# Altium PCB captivate_iso.PcbDoc
Units mil, origin at the board's own origin, x right, y up, seen from the top; angles counter-clockwise.
Board outline 1500 x 1200 mil, 2 copper layers (Top Layer, Bottom Layer), stack 62 mil thick; 20 components, 18 nets, 92 pads, 14 vias.
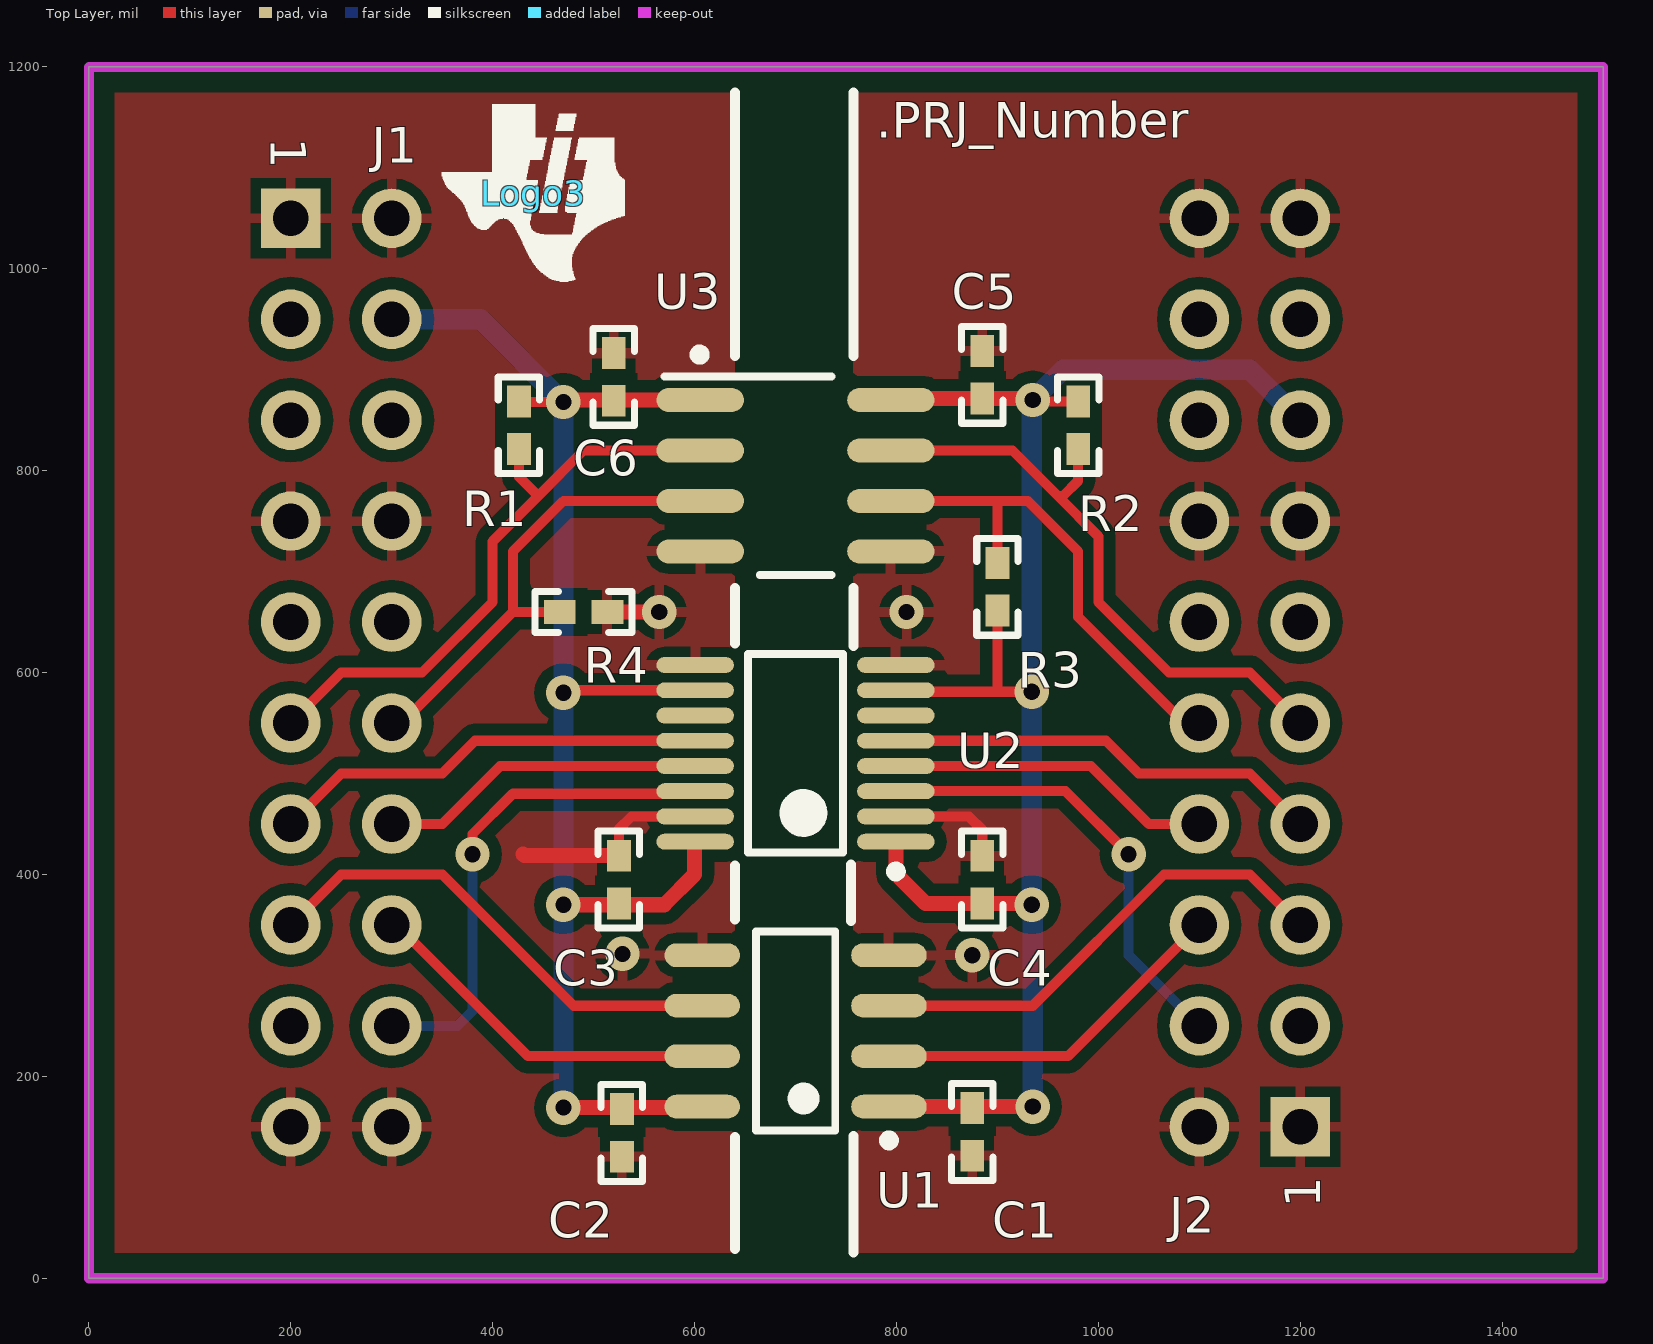
[diagram p0: Top Layer view]
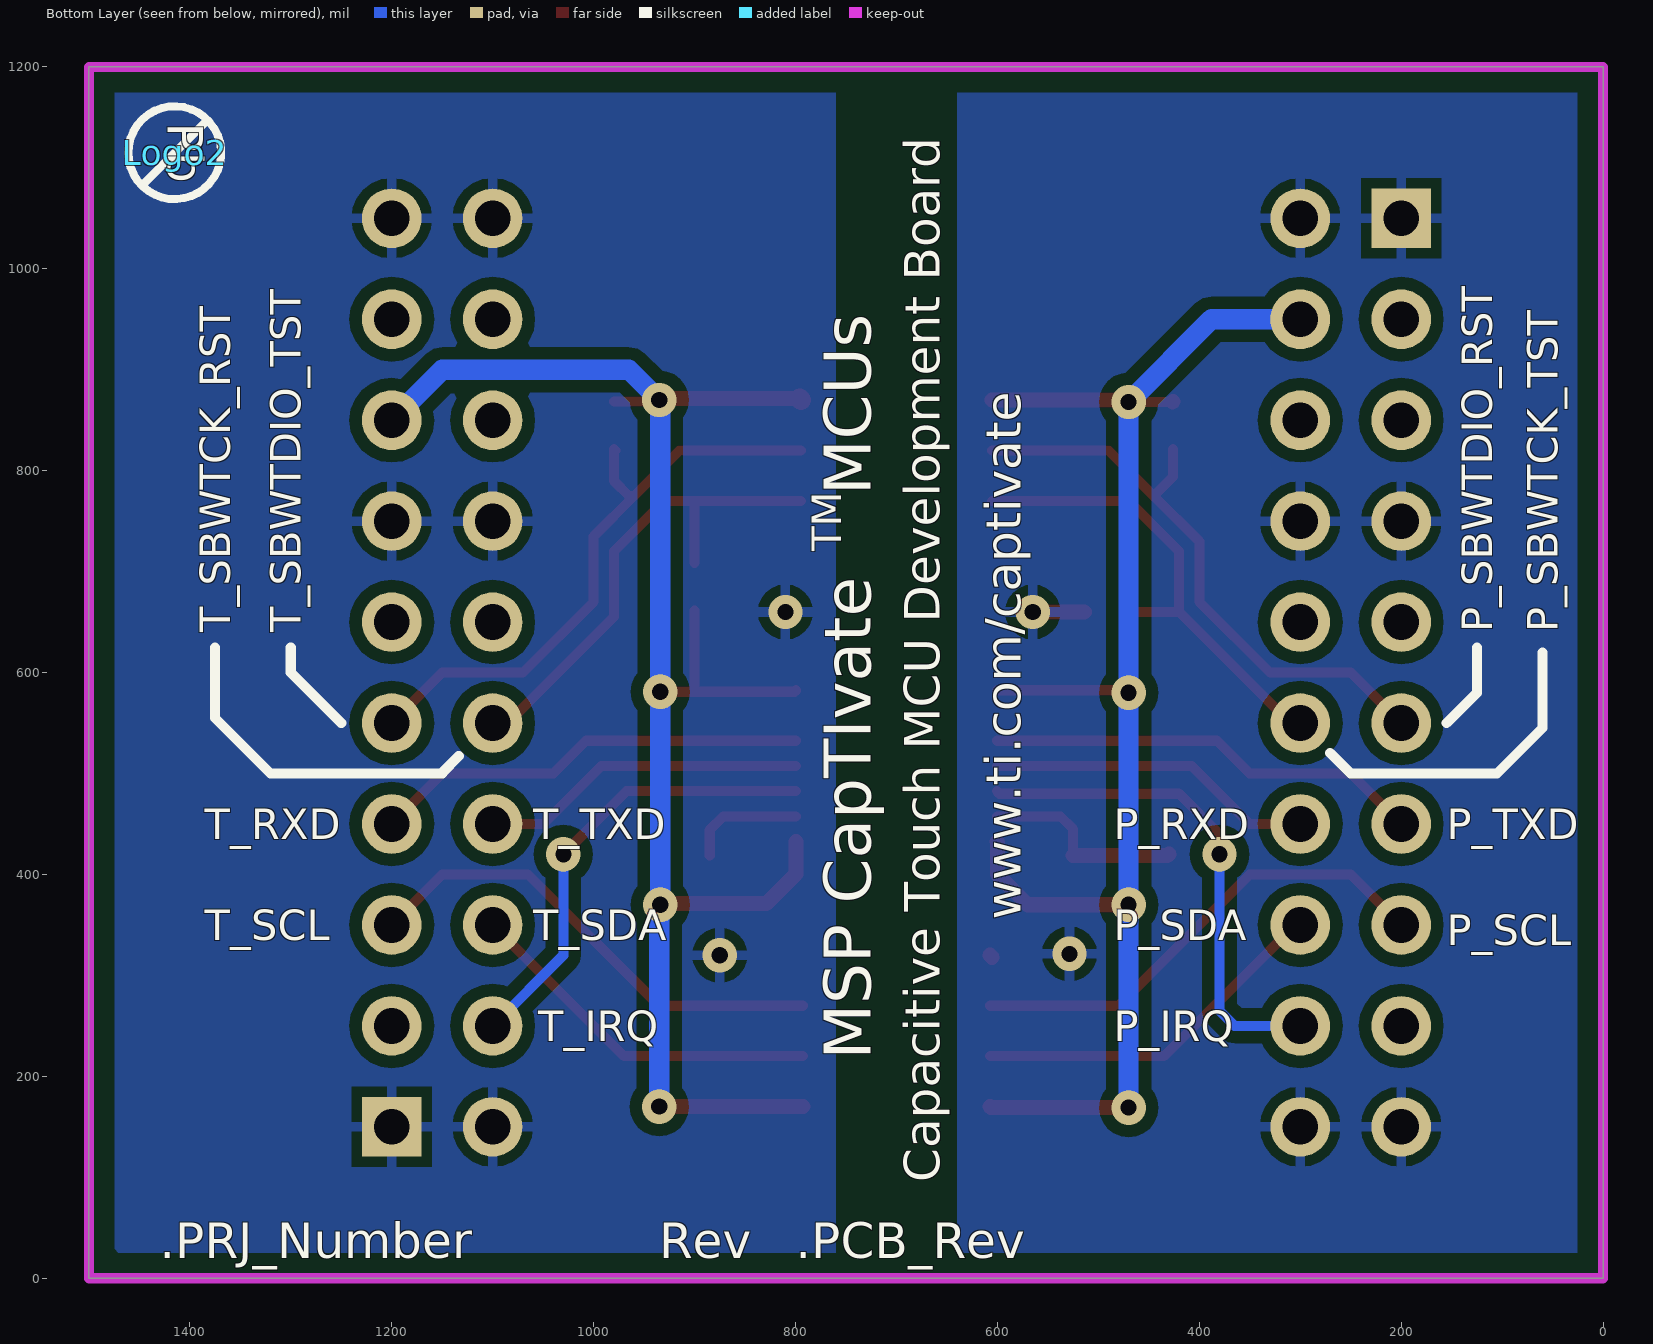
[diagram p1: Bottom Layer view, seen from below]

## Layer stack, top to bottom
Top Solder: solder mask 0.4, Solder Resist, Dk 3.5
Top Layer: signal copper 1.4
Dielectric1: core 59.2, FR-4, Dk 4.8
Bottom Layer: signal copper 1.4
Bottom Solder: solder mask 0.4, Solder Resist, Dk 3.5

## Board outline
0,0 1500,0 1500,1200 0,1200

## Design rules (kind name [scope] priority, off if disabled: settings)
AcuteAngle [All] p1: minimum=4.50000000000000E+0001 checktracksonly=FALSE
AssemblyTestPointUsage [All] p1: valid=2
Clearance Clearance_Keepouts [((IsTrack Or IsArc) And Not InPoly) And IsFree and IsKeepOut vs ((IsTrack Or IsArc) And Not InPoly) And IsFree and IsKeepOut] p1: gap=0
Clearance Clearance_BoardEdge_MountingHoles [OnCopper and InComponentClass('Mounting Holes') vs IsKeepOut] p2: gap=40
Clearance Clearance_BoardEdge_Poly [OnCopper and InPoly vs IsKeepOut] p3: gap=20
Clearance Clearance_BoardEdge [OnCopper and Not InComponentClass('Logo') and not InComponentClass('FiducialMark') and not InRegion(1000,500,4000,800) and Not IsKeepout vs IsKeepOut] p4: gap=75
Clearance Clearance_Poly [InPolygon] p5: gap=12
Clearance [All] p6: gap=7.87
ComponentClearance ComponentClearance_MountingHoles_FiducialMarks [InComponentClass('Mounting Holes') vs InComponentClass('FiducialMark')] p1: gap=50 collisioncheckmode=3 verticalgap=10 showdistances=FALSE
ComponentClearance ComponentClearance_Shunt [InComponentClass('Header') vs InComponentClass('Shunt')] p2: gap=0 collisioncheckmode=3 verticalgap=0 showdistances=FALSE
ComponentClearance ComponentClearance_Logo [InComponentClass('Logo')] p3: gap=50 collisioncheckmode=3 verticalgap=10 showdistances=FALSE
ComponentClearance ComponentClearance_ScrewToNut [(HasFootprint('NY PMS 440 0025 PH')) vs (HasFootprint('Keystone_1902C'))] p4: gap=5 collisioncheckmode=3 verticalgap=10 showdistances=FALSE
ComponentClearance ComponentClearance_MountingHoles [InComponentClass('Mounting Holes')] p5: gap=250 collisioncheckmode=3 verticalgap=100000 showdistances=FALSE
ComponentClearance ComponentClearance_SmallPassives [HasFootprint('0201*') or HasFootprint('0402*') or HasFootprint('0508') or HasFootprint('0603*') or HasFootprint('0612') or HasFootprint('0805*') or HasFootprint('0815*') or HasFootprint('0830*') or HasFootprint('1206*') or HasFootprint('1210*') or HasFootprint('1808*') or HasFootprint('1812*') or HasFootprint('1825*') or HasFootprint('2010*') or HasFootprint('2220*') or HasFootprint('2225*') or HasFootprint('2512*') or HasFootprint('2728*') or HasFootprint('3518*') vs HasFootprint('0201*') or HasFootprint('0402*') or HasFootprint('0508') or HasFootprint('0603*') or HasFootprint('0612') or HasFootprint('0805*') or HasFootprint('0815*') or HasFootprint('0830*') or HasFootprint('1206*') or HasFootprint('1210*') or HasFootprint('1808*') or HasFootprint('1812*') or HasFootprint('1825*') or HasFootprint('2010*') or HasFootprint('2220*') or HasFootprint('2225*') or HasFootprint('2512*') or HasFootprint('2728*') or HasFootprint('3518*')] p6: gap=20 collisioncheckmode=3 verticalgap=10 showdistances=FALSE
ComponentClearance ComponentClearance_THtoSMT [IsThruComponent vs IsSMTComponent] p7: gap=100 collisioncheckmode=3 verticalgap=30 showdistances=FALSE
ComponentClearance ComponentClearance_THtoTH [IsThruComponent vs IsThruComponent] p8: gap=118.11 collisioncheckmode=3 verticalgap=30 showdistances=FALSE
ComponentClearance [All] p9: gap=40 collisioncheckmode=3 verticalgap=10 showdistances=FALSE
DiffPairsRouting [All] p1: maxlimit=100 minlimit=10 mostfreqgap=10 toplayer_minwidth=15 toplayer_maxwidth=15 toplayer_prefwidth=15 bottomlayer_minwidth=15 bottomlayer_maxwidth=15 bottomlayer_prefwidth=15 maxuncoupledlength=1000
FabricationTestPointUsage TestPointUsage [All] p1: valid=2 allowmultiple=FALSE
FabricationTestpoint Testpoint [All] p1: side=3 testpointundercomponent=TRUE minsize=40 maxsize=100 preferedsize=60 minholesize=0 maxholesize=40 preferedholesize=32 testpointgrid=1 allowsidetop=TRUE allowsidebottom=TRUE usegrid=TRUE gridtolerance=0.01
FanoutControl Fanout_LCC [IsLCC] p1: bgadir=Out bgaviamode=Centered fanoutstyle=Auto fanoutdirection=Alternating viagrid=1 // Fanout_LCC (Default Rule)
FanoutControl Fanout_BGA [IsBGA] p2: bgadir=Out bgaviamode=Centered fanoutstyle=Auto fanoutdirection=Alternating viagrid=1 // Fanout_BGA (Default Rule)
FanoutControl Fanout_Default [All] p4: bgadir=Out bgaviamode=Centered fanoutstyle=Auto fanoutdirection=Alternating viagrid=1 // Fanout_Default (Default Rule)
FanoutControl Fanout_Small [(CompPinCount < 5)] p5: bgadir=Out bgaviamode=Centered fanoutstyle=Auto fanoutdirection=OutThenIn viagrid=1 // Fanout_Small (Default Rule)
HoleSize [All] p1: absolutevalues=TRUE maxlimit=251 minlimit=8 maxpercent=80.000 minpercent=20.000
MinimumAnnularRing MinimumAnnularRing_ThermalPadVias [IsVia and InAnyComponent] p1: minimumring=5.91
MinimumAnnularRing [All] p2: minimumring=9
MinimumSolderMaskSliver MinimumSolderMaskSliver_Logo [InComponentClass('Logo') vs InComponentClass('Logo')] p1: minsoldermaskwidth=0.7
MinimumSolderMaskSliver [All] p2: minsoldermaskwidth=3.94
PlaneConnect [All] p1: planeconnectstyle=Relief reliefexpansion=10 reliefentries=4 reliefconductorwidth=10 reliefairgap=10
PolygonConnect [All] p1: connectstyle=Relief reliefconductorwidth=10 reliefentries=4 polygonreliefangle="90 Angle" airgapwidth=10
RoutingVias ThermalPadVias [IsVia and InAnyComponent] p1: holewidth=7.87 width=19.68 viastyle="Through Hole" minholewidth=7.87 minwidth=19.68 maxholewidth=12.99 maxwidth=23.62
RoutingVias [All] p2: holewidth=16 width=34 viastyle="Through Hole" minholewidth=7.87 minwidth=26 maxholewidth=40 maxwidth=65
SilkToBoardRegionClearance [Not ((IsComment or IsDesignator) And (Hide <> 'False')) and not InRegion(1000,500,4000,800)] p1:
SilkToSilkClearance SilkToSilkClearance_Pb-FreeLogo [(HasFootprint('Pb-Free_Overlay_Medium') OR HasFootprint('Pb-Free_Overlay_Small')) vs (HasFootprint('Pb-Free_Overlay_Medium') OR HasFootprint('Pb-Free_Overlay_Small'))] p1: silktosilkclearance=0
SilkToSilkClearance [All] p2: silktosilkclearance=5
SilkToSolderMaskClearance "Silk to Solder Mask Opening" [All] p1: minsilkscreentomaskgap=1 clearancetoexposedcopper=FALSE
SolderMaskExpansion [All] p1: expansion=1.97
UnpouredPolygon [All] p1: allowunpoured=FALSE
Width [All] p1: maxlimit=100 minlimit=6 preferedwidth=10 checkconnectedcopper=TRUE
14 further rules are at their usual default settings.

## Classes and differential pairs
component class hardware: !PCB Logo2 Logo3 ZZ1 ZZ2 ZZ3
component class Logo: Logo3
component class captivate_iso: C1 C2 C3 C4 C5 C6 J1 J2 R1 R2 R3 R4 U1 U2 U3
component class AssemblyNote: ZZ1 ZZ2 ZZ3

## Components (designator, comment, footprint, x,y, rotation, side; value= is the part's Value field where it differs from the comment)
C1 "C1005X5R1A104K" 0402 875,145 r270 top
C2 "C1005X5R1A104K" 0402 528,144 r90 top
C3 "C1005X5R1A104K" 0402 525,395 r270 top
C4 "C1005X5R1A104K" 0402 885,395 r270 top
C5 "C1005X5R1A104K" 0402 885,895 r90 top
C6 "C1005X5R1A104K" 0402 520,893 r270 top
J1 "Connector 10X2RA" CONN2X10RA 200,1050 r270 top locked
J2 "Header 10X2RA" HDR2X10RA 1200,150 r90 top locked
Logo2 "Pb-Free Symbol" Pb-Free_Overlay_Small 1415,1115 r270 bottom
Logo3 "Texas Instruments" TI_Symbol_Overlay_Small 440,1075 r0 top
R1 "CRCW04021K50JNED" 0402 426,845 r90 top
R2 "CRCW0402270RJNED" 0402 980,845 r90 top
R3 "CRCW04021K50JNED" 0402 900,685 r270 top
R4 "CRCW040230K0JNED" 0402 490,660 r180 top
U1 "ISO1540" D0008A_L 700,245 r180 top
U2 "ISO7131CCDBQ" DBQ0016A_N 700,520 r180 top
U3 "ISO1541D" D0008A_N 700,795 r0 top
ZZ1 "These assemblies are ESD sensitive, ESD precautions shall be observed." AssemblyNote -30,2060 r0 top
ZZ2 "These assemblies must be clean and free from flux and all contaminants. Use of no clean flux is not acceptable." AssemblyNote -30,2260 r0 top
ZZ3 "These assemblies must comply with workmanship standards IPC-A-610 Class 2, unless otherwise specified." AssemblyNote -30,2460 r0 top

## Footprints (in the part's own frame and the unit in brackets; to place one, negate y for a bottom-side part, rotate by r counter-clockwise, add the part's x,y. Pads: shape width x height; smd on the part's side, far side on the other; paste and mask are expansions set on the pad)
0402 [mm] "0402 from SM-752 data"
  rect 0.8x0.6 smd: 1(-0.6,0) 2(0.6,0)
  silkscreen extent -1.22,-0.52 1.22,0.52, body extent -0.55,-0.3 0.55,0.3, height 0.6
AssemblyNote [mil] "Assembly Note"
CONN2X10RA [mm] "Connector;F-Receptacle; 10x2 Position; Right Angle"
  rect 1.5x1.5 hole 0.9: 1(0,0)
  round 1.5 hole 0.9: 2(0,2.54) 3(2.54,0) 4(2.54,2.54) 5(5.08,0) 6(5.08,2.54) 7(7.62,0) 8(7.62,2.54) 9(10.16,0) 10(10.16,2.54) 11(12.7,0) 12(12.7,2.54) 13(15.24,0) 14(15.24,2.54) 15(17.78,0) 16(17.78,2.54) 17(20.32,0) 18(20.32,2.54) 19(22.86,0) 20(22.86,2.54)
  body extent -1.52,-10.03 24.38,-1.52, height 4.95
D0008A_L [mm] "SOIC, 8-Leads, Body 4.9x3.9mm, Pitch 1.27mm, IPC High Density"
  oval 1.9x0.6 smd: 1(-2.35,1.905) 2(-2.35,0.635) 3(-2.35,-0.635) 4(-2.35,-1.905) 5(2.35,-1.905) 6(2.35,-0.635) 7(2.35,0.635) 8(2.35,1.905)
  silkscreen extent -2.48,-2.5 1,2.88, body extent -2,-2.5 2,2.5, height 1.75
D0008A_N [mm] "SOIC, 8-Leads, Body 4.9x3.9mm, Pitch 1.27mm, IPC Medium Density"
  oval 2.2x0.6 smd: 1(-2.4,1.905) 2(-2.4,0.635) 3(-2.4,-0.635) 4(-2.4,-1.905) 5(2.4,-1.905) 6(2.4,-0.635) 7(2.4,0.635) 8(2.4,1.905)
  silkscreen extent -3.3,-2.5 0.9,2.5, body extent -3,-2.45 3,2.45, height 1.63
DBQ0016A_N [mm] "SOP, 16-Leads, Body 4.9x3.9mm, Pitch 0.635mm, IPC Medium Density"
  oval 1.95x0.4 smd: 1(-2.525,2.222) 2(-2.525,1.587) 3(-2.525,0.952) 4(-2.525,0.317) 5(-2.525,-0.318) 6(-2.525,-0.953) 7(-2.525,-1.588) 8(-2.525,-2.223) 9(2.525,-2.222) 10(2.525,-1.587) 11(2.525,-0.952) 12(2.525,-0.317) 13(2.525,0.318) 14(2.525,0.953) 15(2.525,1.588) 16(2.525,2.223)
  silkscreen extent -2.65,-2.5 1.2,3.1, body extent -1.99,-2.5 2,2.5, height 1.76
HDR2X10RA [mm] "Connector; M-Header; 10x2 Position; Right Angle"
  rect 1.5x1.5 hole 0.9: 1(0,0)
  round 1.5 hole 0.9: 2(0,2.54) 3(2.54,0) 4(2.54,2.54) 5(5.08,0) 6(5.08,2.54) 7(7.62,0) 8(7.62,2.54) 9(10.16,0) 10(10.16,2.54) 11(12.7,0) 12(12.7,2.54) 13(15.24,0) 14(15.24,2.54) 15(17.78,0) 16(17.78,2.54) 17(20.32,0) 18(20.32,2.54) 19(22.86,0) 20(22.86,2.54)
  body extent -3.81,-11.18 26.67,-1.52, height 7.49
Pb-Free_Overlay_Small [mil]
  silkscreen extent -46,-46 46,46
TI_Symbol_Overlay_Small [mil]
  silkscreen extent -90,-88 91,88

## Part data
C1 C2 C3 C4 C5 C6: "CAP, CERM, 0.1 µF, 10 V, +/- 10%, X5R, 0402"
J1: "Connector, Female, 10-Pin, 2 row, Right Angle"
J2: "Header, Male, 10-Pin, 2 row, Shround, Right Angle"
Logo2: library part Pb-Free
Logo3: library part TI_Logo, "Texas Instrument Corporate Signature"
R1 R3: "RES, 1.5 k, 5%, 0.063 W, 0402"
R2: "RES, 270, 5%, 0.063 W, 0402"
R4: "RES, 30 k, 5%, 0.063 W, 0402"
U1: "I2C Bidirectional Isolator, 2 Channel Width, 3.0 to 12.0 V, -40 to 85 degC, 8-pin SOIC (D), Green (RoHS & no Sb/Br)"
U2: "4242-VPK Small-Footprint and Low-Power Triple Channels Digital Isolators, DBQ0016A"
U3: "Low-Power Bidirectional I2C Isolators, D0008A"
ZZ1 ZZ2 ZZ3: library part AssemblyNote

## Via types
v1: diameter 34, hole 16, Top Layer to Bottom Layer, tented both sides, 14 vias

## Nets (pads, with @x,y where several pads share a name; then routed paths per layer and width w, separated by ;. In a path a pad name is that pad's centre, name@x,y a point inside that pad or via, vN(x,y) a via of type N, cw(c..) or ccw(c..) an arc to the next point about the centre after c; other vN are vias at no path point)
P_GND: C2.1 C3.1 C6.1 J1.1 J1.2 J1.7 J1.8 J1.19 J1.20 R4.1 U1.5 U2.9 U2.15 U3.4 | length 256.9
  Top Layer w10: C3.1 525,445 537.5,457.5 U2.15
  Top Layer w15: 430,420 431.38,418.62 C3.1 ; R4.1 v1(565,660) ; U1.5@605.48,318 U1.5
  other v1: 528.62,321.38
P_IRQ: J1.18 U2.14 | length 499.4
  Top Layer w10: v1(380,420) 380,440 420,480 598.09,480 U2.14
  Bottom Layer w10: J1.18 365,250 380,265 v1(380,420)
P_RXD: J1.14 U2.13 | length 324.7
  Top Layer w10: J1.14@300,450.28 J1.14 350,450 407.5,507.5 U2.13
P_SBWTCK: J1.12 R4.2 U3.3 | length 478.2
  Top Layer w10: J1.12 310,550 420,660 ; R4.2 420,660 ; U3.3 470,770 420,720 420,660
P_SBWTDIO: J1.11 R1.1 U3.2 | length 606.7
  Top Layer w10: J1.11 250,600 330,600 400,670 400,730 445,775 ; R1.1 426,794 445,775 ; U3.2 490,820 445,775
P_SCL: J1.15 U1.6 | length 482
  Top Layer w10: J1.15 250,400 350,400 480,270 U1.6
P_SDA: J1.16 U1.7 | length 361.3
  Top Layer w10: J1.16 305,350 435,220 U1.7
P_TXD: J1.13 U2.12 | length 434.8
  Top Layer w10: J1.13 250,500 350,500 382.5,532.5 U2.12
P_VCC: C2.2 C3.2 C6.2 J1.4 R1.2 U1.8 U2.10 U2.16 U3.1 | length 1525.4
  Top Layer w10: R1.2@426.62,868 v1(470,868) ; v1(470,580) 472.5,582.5 U2.10
  Top Layer w15: R1.2 R1.2@426.62,868 ; v1(470,169) 606.48,169 U1.8 ; v1(470,370) 570,370 600,400 600,431.91 U2.16 ; v1@472,870 U3.1
  Bottom Layer w20: J1.4 388,950 v1(470,868) v1(470,580) v1(470,370) v1(470,169)
T_GND: C1.2 C4.1 C5.2 J2.1 J2.2 J2.13 J2.14 J2.19 J2.20 U1.4 U2.2 U2.8 U3.5 | length 121.7
  Top Layer w10: U2.2 871.71,457.5 885,444.21 C4.1
  Top Layer w15: v1(875,320) v1@875,325
  other v1: 810,660
T_IRQ: J2.4 U2.3 | length 455.5
  Top Layer w10: U2.3 967.5,482.5 v1(1030,420)
  Bottom Layer w10: v1(1030,420) 1030,320 J2.4
T_RXD: J2.7 U2.5 | length 434.8
  Top Layer w10: U2.5 1007.5,532.5 1040,500 1150,500 J2.7
T_SBWTCK: J2.10 R3.1 U3.6 | length 496.1
  Top Layer w10: U3.6 900,770 ; R3.1 900,770 ; J2.10 1085,550 980,655 980,720 930,770 900,770
T_SBWTDIO: J2.9 R2.1 U3.7 | length 615
  Top Layer w10: U3.7 915,820 960,775 ; R2.1@978.62,820 R2.1 980,790 965,775 960,775 ; J2.9 1150,600 1070,600 1000,670 1000,735 960,775
T_SCL: J2.5 U1.3 | length 482
  Top Layer w10: U1.3 935,270 1065,400 1150,400 J2.5
T_SDA: J2.6 U1.2 | length 361.3
  Top Layer w10: U1.2 970,220 J2.6
T_TXD: J2.8 U2.4 | length 324.4
  Top Layer w10: U2.4 992.5,507.5 1050,450 J2.8
T_VCC: C1.1 C4.2 C5.1 J2.15 R2.2 R3.2 U1.1 U2.1 U2.7 U3.8 | length 1723.4
  Top Layer w10: U2.7 800.91,581 900,581 ; R3.2 900,581 ; v1(934,581) 900,581 ; v1(935,870) 936.38,868.62 R2.2
  Top Layer w15: U1.1 v1(935,170) ; U3.8@795.87,871.38 C5.1 v1@933.62,871.38 ; U2.1 799.41,400.59 828.62,371.38 C4.2 932.62,371.38 v1(934,370)
  Top Layer w20: U3.8 U3.8@795.87,871.38 ; v1@933.62,871.38 v1(935,870)
  Bottom Layer w20: v1(935,170) 935,360 934,361 v1(934,370) v1(934,581) 934,869 v1(935,870) 965,900 1150,900 J2.15
pads on no net: J1.3 J1.5 J1.6 J1.9 J1.10 J1.17 J2.3 J2.11 J2.12 J2.16 J2.17 J2.18 U2.6 U2.11

## Polygon pours and split planes (outlines as drawn)
P_GND on Top Layer "Top Layer-No Net" (solid, remove dead copper, pour order 2): 0,1200 640,1200 640,0 0,0
T_GND on Top Layer "M1 Board Outline-No Net" (solid, remove dead copper, pour order 4): 1497.3,1198.5 757.3,1198.5 757.3,-1.5 1497.3,-1.5 1497.3,1198.5
P_GND on Bottom Layer "Bottom Layer-No Net" (solid, pour order 6): 0,1200 640,1200 640,0 0,0 0,1200
T_GND on Bottom Layer "Bottom Layer-No Net 1" (solid, pour order 8): 1500,1200 760,1200 760,0 1500,0 1500,1200

## Keep-outs
Keep-Out Layer:
  the board outline again, w10
  text ".Layer_Name" at -923,-1858.49 h60

## Other copper
Top Layer:
  text ".Layer_Name" at -923,-1858.49 h60
Bottom Layer:
  text ".Layer_Name" at -923,-1858.49 h60

## Silkscreen, mask and mechanical layers (free items; w line width, h text height)
Top Overlay:
  circle w10: c605,915 r5
  lines w10: 640,29.03 640,139.68 ; 640,355.37 640,408.99 ; 640,628.61 640,683.58 ; 640,913.73 640,1174.51 ; 755,353.8 755,409.76 ; 757.3,25.49 757.3,140.87 ; 757.3,626.55 757.3,683.58 ; 757.3,913.73 757.3,1174.51
  text ".PRJ_Number" at 780,1130 h35
  text ".Layer_Name" at -923,-1858.49 h35
Bottom Overlay:
  lines w10: 60,620 60,550 60,545 105,500 165,500 250,500 270.38,520.38 ; 125,625 125,585 125,580 155,550 ; 1133.57,517.33 1150,500.91 1150,500 1320,500 1325,505 1375,555 1375,625 ; 1250,550 1300,600 1300,625
  text "TM" at 745,720 h50 r270
  text "P_SBWTCK_TST" at 45,640 h30 r270
  text "P_SBWTDIO_RST" at 110,640 h30 r270
  text "T_SBWTDIO_TST" at 1290,640 h30 r270
  text "T_SBWTCK_RST" at 1360,640 h30 r270
  text "P_TXD" at 155,435 h30
  text "P_RXD" at 485,435 h30
  text "T_TXD" at 1060,435 h30
  text "T_RXD" at 1385,435 h30
  text "www.ti.com/captivate" at 565,355 h60 r270
  text "P_SDA" at 485,335 h30
  text "T_SDA" at 1060,335 h30
  text "T_SCL" at 1385,335 h30
  text "P_SCL" at 155,330 h30
  text "P_IRQ" at 485,235 h30
  text "T_IRQ" at 1055,235 h30
  text "MSP CapTIvate    MCUs" at 710,216.39 h80 r270
  text "Capacitive Touch MCU Development Board" at 645,95 h60 r270
  text ".PCB_Rev" at 800,20 h35
  text "Rev" at 935,20 h35
  text ".PRJ_Number" at 1430,20 h35
  text ".Layer_Name" at -923,-1858.49 h60
Top Paste:
  text ".Layer_Name" at -923,-1858.49 h60
Bottom Paste:
  text ".Layer_Name" at -923,-1858.49 h60
Top Solder:
  text ".Layer_Name" at -923,-1858.49 h60
  text ".Layer_Name" at -923,-1858.49 h60
Bottom Solder:
  text ".Layer_Name" at -923,-1858.49 h60
Drill Guide:
  text ".Layer_Name" at -923,-1858.49 h60
M1 Board Outline:
  the board outline again, w10
  text ".Layer_Name" at -923,-1858.49 h60
M2 Board Dimensions:
  rectangle: -1500,-1275 -1375,-1150
  rectangle: -1375,-1400 -1000,-1275
  lines w7: -1500,-1275 -500,-1275 ; -1375,-1400 -1375,-1150 ; -1250,-1400 -1250,-1150 ; -1000,-1400 -1000,-1150 ; -750,-1400 -750,-1150 ; -1500,-1400 -500,-1400 -500,-1150 -1500,-1150 -1500,-1400
  text ".Layer_Name" at -923,-1858.49 h60
M3 3D STEP Top:
  text ".Layer_Name" at -923,-1858.49 h60
M4 3D STEP Bottom:
  text ".Layer_Name" at -923,-1858.49 h60
M5 Assembly Top:
  lines w10: -1792,-1930.17 4808,-1930.17 ; -1792,-1726.83 4810,-1726.83 ; -1792,-1523.5 -1792,-2133.5 2213,-2133.5 4810,-2133.5 4810,-1523.5 -1791.5,-1523.5 -1791.5,-2133.5 -216,-2133.5 ; 673,-2133.5 673,-1523.5 ; 1940,-1726.83 1940,-1523.5 ; 2780,-1726.83 2780,-1523.5 ; 3402,-2140 3402,-1937.17
  text "COMPONENTS MARKED 'DNP' SHOULD NOT BE POPULATED." at -346.5,-1318.5 h60
  text "ASSEMBLY VARIANT:" at -347,-1434 h60
  text ".VariantName" at 689,-1434 h60
  text "PCB VIEWED FROM TOP SIDE" at -1728.5,-1655.67 h60
  text "BOARD #:" at 748,-1655.67 h60
  text ".PRJ_Number" at 1293.5,-1655.67 h60
  text "REV:" at 2138,-1655.67 h60
  text ".PCB_Rev" at 2429.5,-1655.67 h60
  text "SVN REV:" at 2976,-1655.67 h60
  text ".VersionControl_RevNumber" at 3482,-1655.67 h60
  text "PLOT NAME =" at -1728.5,-2064.34 h60
  text ".plot_File_Name" at -923,-2064.34 h60
  text "GENERATED    :" at 750,-2064.34 h60
  text ".Print_Date" at 1619.5,-2064.34 h60
  text ".Print_Time" at 2348.5,-2064.34 h60
  text "TEXAS INSTRUMENTS" at 3613,-2064.34 h60
M6 Assembly Bottom:
  lines w10: -1792.5,-1727.33 4809.5,-1727.33 ; -1790.5,-1930.67 4809.5,-1930.67 ; -384.5,-2140.5 -384.5,-1937.67 ; 237.5,-1727.33 237.5,-1524 ; 1077.5,-1727.33 1077.5,-1524 ; 2344.5,-2134 2344.5,-1524 ; 3233.5,-2134 4809,-2134 4809,-1524 -1792.5,-1524 -1792.5,-2134 804.5,-2134 4809.5,-2134 4809.5,-1524
  text "COMPONENTS MARKED 'DNP' SHOULD NOT BE POPULATED." at 4602,-1318 h60
  text ".VariantName" at 3558,-1434 h60
  text "ASSEMBLY VARIANT:" at 4597,-1434 h60
  text ".VersionControl_RevNumber" at -464.5,-1656.17 h60
  text "SVN REV:" at 41.5,-1656.17 h60
  text ".PCB_Rev" at 588,-1656.17 h60
  text "REV:" at 879.5,-1656.17 h60
  text ".PRJ_Number" at 1724,-1656.17 h60
  text "BOARD #:" at 2269.5,-1656.17 h60
  text "PCB VIEWED FROM BOTTOM SIDE" at 4746,-1656.17 h60
  text "TEXAS INSTRUMENTS" at -595.5,-2064.84 h60
  text ".Print_Time" at 669,-2064.84 h60
  text ".Print_Date" at 1398,-2064.84 h60
  text "GENERATED    :" at 2267.5,-2064.84 h60
  text ".plot_File_Name" at 3940.5,-2064.84 h60
  text "PLOT NAME =" at 4746,-2064.84 h60
M9 Title Sheet:
  drawing of 57 lines, arcs and shapes, not listed
  text "1" at -760.16,7036.5 h70
  text "2" at 1735.5,7036.5 h70
  text "3" at 4224.84,7036.5 h70
  text "4" at 6731.51,7036.5 h70
  text "5" at 9230.5,7036.5 h70
  text "6" at 11735.5,7036.5 h70
  text "A" at -1916.5,5893.5 h70
  text "A" at 12883.5,5893.5 h70
  text "B" at -1916.5,3513.5 h70
  text "B" at 12883.5,3513.5 h70
  text "C" at -1916.5,1138.5 h70
  text "C" at 12883.5,1138.5 h70
  text "PROJECT TITLE:" at 9843.5,-722.5 h45
  text ".PRJ_Title" at 9893.5,-855.83 h70
  text "DESIGNED FOR:" at 9843.5,-1023.5 h45
  text ".PRJ_Customer" at 9893.5,-1163.5 h70
  text "D" at -1916.5,-1231.5 h70
  text "D" at 12883.5,-1231.5 h70
  text "FILE NAME:" at 9843.5,-1323.5 h45
  text ".PCB_File_Name_No_Path" at 9893.5,-1443.5 h70
  text "Texas Instruments (TI) and/or its licensors do not warrant the accuracy or completeness of this specification" at 4874,-1605.34 h45
  text "ENGINEER:" at 9843.5,-1613.5 h45
  text "LAYOUT BY:" at 11348.5,-1613.5 h45
  text "or any information contained therein. TI and/or its licensors do not warrant that this design will meet" at 4829.01,-1718 h45
  text ".PRJ_Engineer" at 9893.5,-1768.49 h70
  text ".PCB_Layout" at 11399,-1768.49 h70
  text "the specifications, will be suitable for your application or fit for any particular purpose, or will operate in" at 4829.01,-1830.67 h45
  text ".Layer_Name" at -923,-1858.49 h60
  text "ALTIUM DESIGNER VERSION:" at 11348.5,-1923.5 h45
  text "an implementation. TI and/or its licensors do not warrant that the design is production worthy. You should" at 4829.01,-1943.33 h45
  text "completely validate and test your design implementation to confirm the system functionality for your application." at 4874,-2056 h45
  text ".print_Scale" at 9893.5,-2056.83 h70
  text ".Application_BuildNumber" at 11399,-2056.83 h70
  text "1" at -760.16,-2263.5 h70
  text "2" at 1735.5,-2263.5 h70
  text "3" at 4224.84,-2263.5 h70
  text "4" at 6731.51,-2263.5 h70
  text "5" at 9230.5,-2263.5 h70
  text "6" at 11735.5,-2263.5 h70
M10 Fab Notes:
  drawing of 185 lines, arcs and shapes, not listed
  text "DESIGN INFORMATION" at 10881.02,4910 h60
  text "MIN. TRACK WIDTH:" at 10236.46,4730 h60
  text "10" at 11332.7,4730 h60
  text "MIL" at 11487.46,4730 h60
  text "MIN. CLEARANCE:" at 10236.46,4598 h60
  text "0.2" at 11272.7,4598 h60
  text "mm" at 11487.46,4598 h60
  text "MIN. VIA PAD SIZE:" at 10236.46,4466 h60
  text "24" at 11302.71,4466 h60
  text "MIL" at 11487.46,4466 h60
  text "0.05mm (2MIL)" at 10931.46,4324.29 h60
  text "MINIMUM ANNULAR RING" at 9907.23,4320 h60
  text "EXTERNAL" at 11639.46,4320 h60
  text "PER" at 10107.23,4202 h60
  text "IPC-D-275 CLASS 2 LEVEL C" at 10327.23,4202 h60
  text "MIL, HOLES" at 11815.46,4089.71 h60
  text "+/-" at 11423,4089 h60
  text "+/-" at 12277,4089 h60
  text "REGISTRATION TOLERANCES:" at 9907.23,4084 h60
  text "METAL" at 11107,4084 h60
  text "5" at 11683.2,4084 h60
  text "3" at 12516.2,4084 h60
  text "MIL" at 12632.46,4084 h60
  text "MATERIAL:" at 9832.46,3874.54 h60
  text "FR-4 High Tg" at 10818.9,3734.21 h60
  text "FR-408" at 10253.46,3725.64 h60
  text "X" at 10665.46,3725.64 h60
  text "OTHER" at 11741.46,3725.64 h60
  text "62 MIL (1.6mm) +/-10%" at 10573.56,3562.92 h60
  text "THICKNESS:" at 9907.23,3558.64 h60
  text "X" at 10445.4,3558.64 h60
  text "OTHER" at 11858.46,3558.64 h60
  text "TOLERANCE:" at 9907.23,3400.64 h60
  text "X" at 10746.53,3400.64 h60
  text "ANSI IPC-6012 TYPE 3 CLASS 2" at 10933.48,3400.64 h60
  text "OTHER +/-" at 10933.46,3244.64 h60
  text "BOW & TWIST:" at 9907.23,3087.64 h60
  text "X" at 10746.53,3087.64 h60
  text "ANSI IPC-6012 TYPE 3 CLASS 2" at 10933.48,3087.64 h60
  text "OTHER +/-" at 10933.46,2929.13 h60
  text "DRILLING:" at 9832.46,2790.64 h60
  text "REFERENCE:" at 9907.23,2673.64 h60
  text "X" at 10555.46,2673.64 h60
  text "AS SHOWN" at 10742.46,2673.64 h60
  text "X" at 11456.46,2673.64 h60
  text "NC_DRILL FILES" at 11593.46,2673.64 h60
  text "X" at 11260,2520 h60
  text "PTH MIN COPPER THICKNESS:" at 9907.23,2515.64 h60
  text "1MIL" at 11394.46,2515.64 h60
  text "OTHER" at 11891.46,2515.64 h60
  text "BOARD FINISH:" at 9832.46,2356.64 h60
  text "SILKSCREEN:" at 9987.68,2238.64 h60
  text "X" at 10936.46,2238.64 h60
  text "TOP" at 11062.46,2238.64 h60
  text "X" at 11446.46,2238.64 h60
  text "BOTTOM" at 11573.46,2238.64 h60
  text "SILKSCREEN COLOR:" at 9987.68,2071.64 h60
  text "X" at 10935.42,2071.64 h60
  text "WHITE" at 11062.46,2071.64 h60
  text "OTHER" at 11573.46,2071.64 h60
  text "SOLDER RESIST COLOR:" at 9987.68,1901.64 h60
  text "X" at 11655,1770 h60
  text "GREEN" at 10682.46,1742.44 h60
  text "BLUE" at 11273.46,1742.44 h60
  text "OTHER" at 11811.46,1742.44 h60
  text "BLACK" at 12125,1735 h200
  text "IMMERSION GOLD (ENIG)" at 10893.46,1553.92 h60
  text "ENEPIG" at 12231,1550.64 h60
  text "SURFACE FINISH:" at 9832.46,1549.64 h60
  text "X" at 10706.51,1549.64 h60
  text "IMM. TIN/SILVER OR EQUIV" at 10162,1392.64 h60
  text "OTHER" at 11593.46,1392.64 h60
  text "ARRAY/PANEL:" at 9832.46,1213.64 h60
  text "CUT AND TRIM PER MECH LAYER 1" at 10893.46,1209.35 h60
  text "N.C. ROUTE" at 10893.46,1057.64 h60
  text "X" at 11572.46,1057.64 h60
  text "V. SCORE" at 11759.46,1057.64 h60
  text "CERTIFICATION:" at 9832.46,920.64 h60
  text "MATERIALS AND WORKMANSHIP FOR ALL PCBS" at 10557.46,920.64 h60
  text "TO MEET OR EXCEED THE REQUIREMENTS OF:" at 10557.46,822.64 h60
  text "X" at 10183.96,686.13 h60
  text "ANSI IPC-A-600F CLASS ->" at 10322.96,686.13 h60
  text "X" at 11962.02,686.13 h60
  text "2" at 12080.96,686.14 h60
  text "1" at 11765.96,684.64 h60
  text "3" at 12434.96,684.64 h60
  text "X" at 10186.02,526.64 h60
  text "UL 94V-0" at 10322.96,526.64 h60
  text "X" at 10998.02,526.64 h60
  text "RoHS" at 11134.96,526.64 h60
  text "OTHER" at 11779.36,526.64 h60
  text "PER ORDER" at 12176.42,526.64 h60
  text "ADDITIONAL REQUIREMENTS:" at 9832.46,385.64 h60
  text "MICROSECTION:" at 9907.23,270.64 h60
  text "YES" at 10812.96,270.64 h60
  text "REQUIRED" at 11674.46,114.49 h60
  text "BARE BOARD ELEC. TEST:" at 9907.23,111.64 h60
  text "NONE" at 11212.96,111.64 h60
  text "X" at 11547.46,111.64 h60
  text "PER ORDER" at 12266.46,111.64 h60
  text "MANUFACTURER'S UL:" at 9907.23,-45.36 h60
  text "RAIL" at 11072.96,-49.65 h60
  text "METAL" at 11564.77,-49.65 h60
  text "X" at 11940,-50 h60
  text "SILK" at 12076.46,-49.65 h60
  text ".Layer_Name" at -923,-1858.49 h60
M11 Gerber Information:
  lines w10: -1792,-1930.17 4808,-1930.17 ; -1792,-1726.83 4810,-1726.83 ; -1792,-1523.5 -1792,-2133.5 2213,-2133.5 4810,-2133.5 4810,-1523.5 -1791.5,-1523.5 -1791.5,-2133.5 -216,-2133.5 ; 673,-2133.5 673,-1523.5 ; 1940,-1726.83 1940,-1523.5 ; 2780,-1726.83 2780,-1523.5 ; 3402,-2140 3402,-1937.17
  text "ALL ARTWORK VIEWED FROM TOP SIDE" at -1728.5,-1655.67 h60
  text "BOARD #:" at 748,-1655.67 h60
  text ".PRJ_Number" at 1293.5,-1655.67 h60
  text "REV:" at 2138,-1655.67 h60
  text ".PCB_Rev" at 2429.5,-1655.67 h60
  text "SVN REV:" at 2976,-1655.67 h60
  text ".VersionControl_RevNumber" at 3482,-1655.67 h60
  text "LAYER NAME =" at -1728.5,-1858.49 h60
  text "PLOT NAME =" at -1728.5,-2064.34 h60
  text ".plot_File_Name" at -923,-2064.34 h60
  text "GENERATED    :" at 750,-2064.34 h60
  text ".Print_Date" at 1619.5,-2064.34 h60
  text ".Print_Time" at 2348.5,-2064.34 h60
  text "TEXAS INSTRUMENTS" at 3613,-2064.34 h60
M12 Stackup:
  text ".Layer_Name" at -923,-1858.49 h60
M13 Component Bodies Top:
  text ".Layer_Name" at -923,-1858.49 h60
M14 Component Bodies Bottom:
  text ".Layer_Name" at -923,-1858.49 h60
M15 Courtyards Top:
  text ".Layer_Name" at -923,-1858.49 h60
M16 Courtyards Bottom:
  text ".Layer_Name" at -923,-1858.49 h60
Drill Drawing:
  circle w1: c7112.9,-1025.71 r20.77
  lines w1: 7092.13,-880.32 7133.67,-880.32 7112.9,-921.86 7092.13,-880.32
  lines w12: 7035,-1083.87 9064.11,-1083.87 ; 7035,-834.62 9064.11,-834.62 ; 7383.13,-1208.49 7383.13,-710 ; 7725.32,-1208.49 7725.32,-710 ; 8372.06,-1208.49 8372.06,-710 ; 8641.38,-1208.49 8641.38,-710 ; 7035,-1208.49 9064.11,-1208.49 9064.11,-710 7035,-710 7035,-1208.49
  text "Symbol" at 7109.77,-797.24 h72
  text "Quantity" at 7420.52,-797.24 h72
  text "Finished Hole Size" at 7762.7,-797.24 h72
  text "Plated" at 8409.45,-797.24 h72
  text "Hole Type" at 8678.77,-797.24 h72
  text "14" at 7420.52,-921.86 h60
  text "16.00mil (0.406mm)" at 7762.7,-921.86 h60
  text "PTH" at 8409.45,-921.86 h60
  text "Round" at 8678.77,-921.86 h60
  text "40" at 7420.52,-1046.48 h60
  text "35.43mil (0.900mm)" at 7762.7,-1046.48 h60
  text "PTH" at 8409.45,-1046.48 h60
  text "Round" at 8678.77,-1046.48 h60
  text "54 Total" at 7420.52,-1171.1 h60
  text ".Layer_Name" at -923,-1858.49 h60

## Dimensions
0,0 to 0,1200 on M2 Board Dimensions
0,0 to 1500,0 on M2 Board Dimensions
-1500,-1400 to -500,-1400 on M2 Board Dimensions

## Text inside footprints (layer, text, board x,y; h text height)
J1: Top Overlay "1" at 180,1130 h35 r270; M5 Assembly Top "PCB edge" at 0,0 h20 r270
J2: Top Overlay "1" at 1220,70 h35 r90; M5 Assembly Top "PCB edge" at 1500,1250 h20 r90
Logo2: Bottom Overlay "Pb" at 1433.9,1144.6 h60 r90